# EAGLE board usbtinyisp_single (EAGLE 6.5.0)
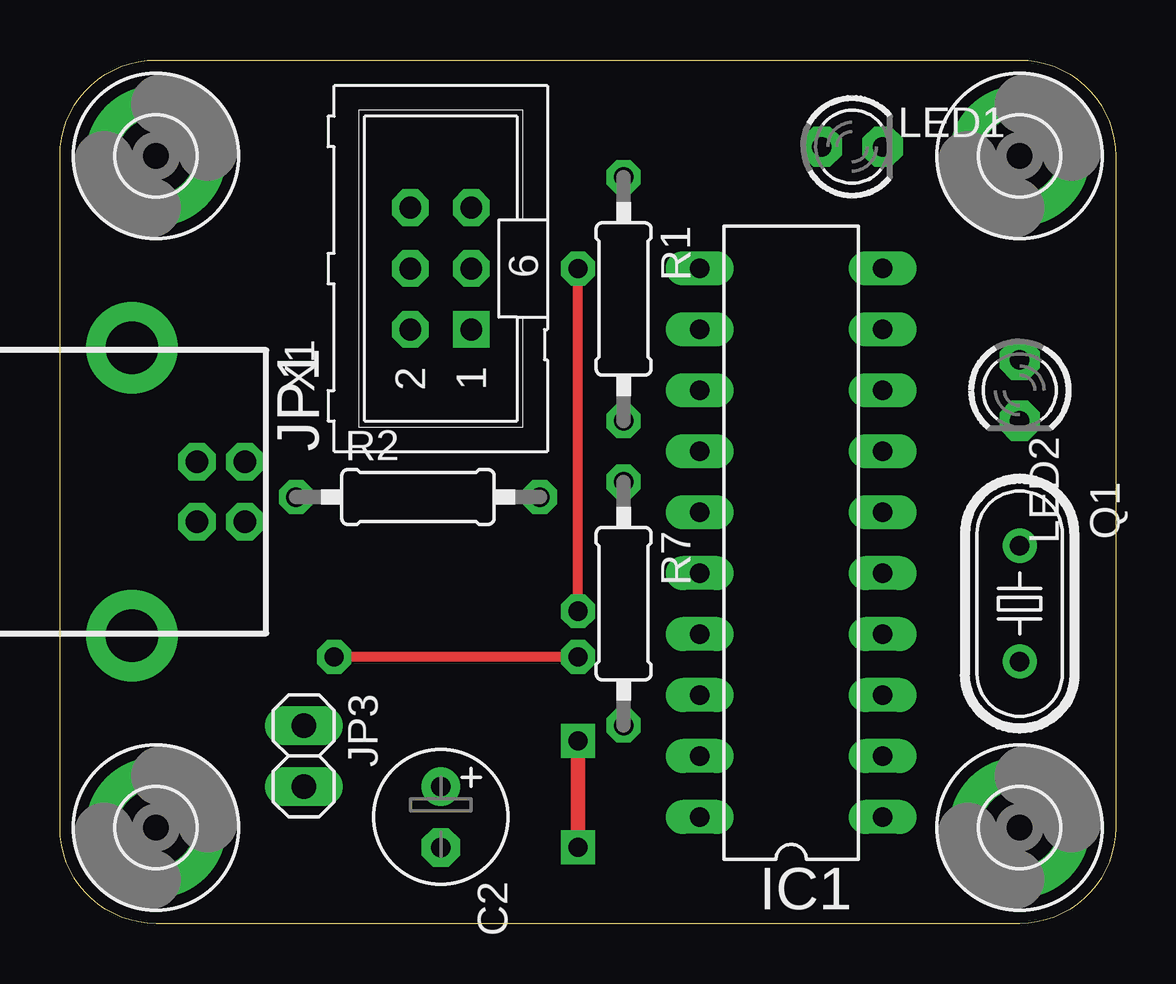
[diagram p0: board, top side]
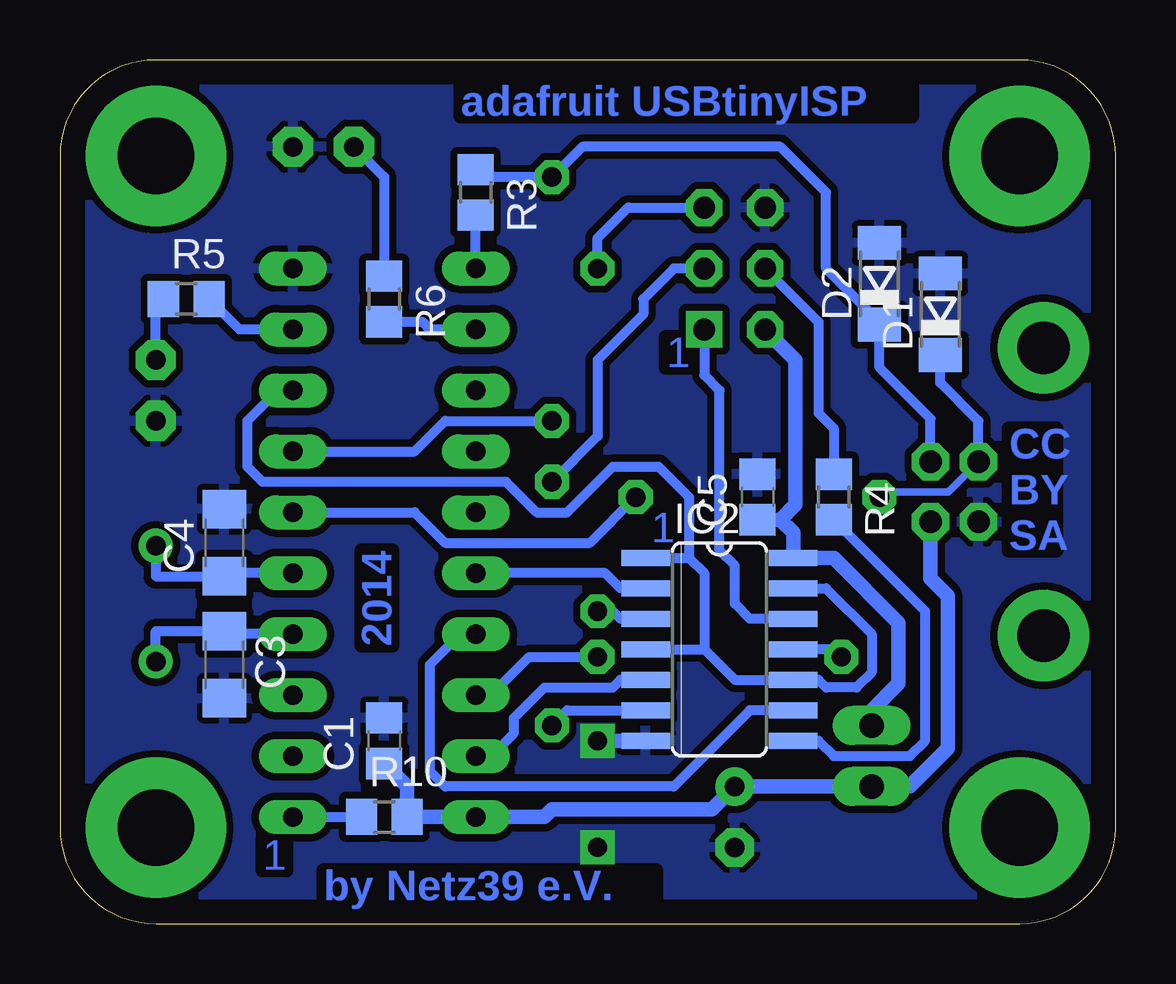
[diagram p1: board, bottom side, seen from below]

Size 44 x 36 mm. Coordinates in mm from the lower left corner, seen from the top.
Outline: 4,36 40,36 arc-90 44,32 44,4 arc-90 40,0 4,0 arc-90 0,4 0,32 arc-90 4,36
Copper layers (1*16): Top 0.035mm / dielectric 1.5mm / Bottom 0.035mm
Design rules "default *": minimum track width 12mil, minimum drill 0.8mm, track to track 12mil, track to pad 12mil, pad to pad 12mil, via to via 12mil, smd to smd 0mil, copper to edge 40mil, drill to drill 8mil, minimum pad ring 12mil, minimum via ring 12mil, stop-mask expansion 4mil, vias tented up to drill 0mil, thermal gap 10mil
Net classes: 0 default: width 0.305 mm; 1 supply: width 0.406 mm

## Footprints (pad centres in the part's own frame; a part is rotated, then mirrored left to right if it is on the bottom)
C0805 = smd 1.3 x 1.5: 1 -0.95,0; 2 0.95,0
E2,5-6 = drill 0.813 pad 1.6: + -1.27,0 | drill 0.813 pad 1.6 octagon: - 1.27,0
C1206 = smd 1.6 x 1.8: 1 -1.4,0; 2 1.4,0
SOD80C = smd 1.4 x 1.8: A 1.7,0; C -1.7,0
DIL20 = drill 0.813 long: 1 -11.43,-3.81; 2 -8.89,-3.81; 3 -6.35,-3.81; 4 -3.81,-3.81; 5 -1.27,-3.81; 6 1.27,-3.81; 7 3.81,-3.81; 8 6.35,-3.81; 9 8.89,-3.81; 10 11.43,-3.81; 11 11.43,3.81; 12 8.89,3.81; 13 6.35,3.81; 14 3.81,3.81; 15 1.27,3.81; 16 -1.27,3.81; 17 -3.81,3.81; 18 -6.35,3.81; 19 -8.89,3.81; 20 -11.43,3.81
SO14 = smd 0.66 x 2.032: 1 -3.81,-3.073; 2 -2.54,-3.073; 3 -1.27,-3.073; 4 0,-3.073; 5 1.27,-3.073; 6 2.54,-3.073; 7 3.81,-3.073; 8 3.81,3.073; 9 2.54,3.073; 10 1.27,3.073; 11 0,3.073; 12 -1.27,3.073; 13 -2.54,3.073; 14 -3.81,3.073
ML6 = drill 0.914 square: 1 -2.54,-1.27 | drill 0.914 octagon: 2 -2.54,1.27; 3 0,-1.27; 4 0,1.27; 5 2.54,-1.27; 6 2.54,1.27
1X02 = drill 1.016 long: 1 -1.27,0; 2 1.27,0
LED3MM = drill 0.813 pad 1.676 octagon: A -1.27,0; K 1.27,0
HC49U-V = drill 0.813: 1 -2.413,0; 2 2.413,0
0207/10 = drill 0.813 octagon: 1 -5.08,0; 2 5.08,0
R0805 = smd 1.3 x 1.5: 1 -0.95,0; 2 0.95,0
3,2-PAD = drill 3.2 pad 5.842: B3,2 0,0
PN61729 = drill 0.95 pad 1.575 octagon: 1 1.25,4.71; 2 -1.25,4.71; 3 -1.25,2.71; 4 1.25,2.71 | drill 2.2 pad 3.81: P$1 -6,0; P$2 6,0

## Placement (x,y rotation side)
C1  100n  [C0805]  30.48,7.62 90 bottom
C2  100u  [E2,5-6]  15.88,4.45 270 top
C3  22p  [C1206]  37.15,10.79 270 bottom
C4  22p  [C1206]  37.15,15.88 90 bottom
C5  100n  [C0805]  14.92,17.78 90 bottom
D1  3V6  [SOD80C]  7.3,25.4 90 bottom
D2  3V6  [SOD80C]  9.84,26.67 90 bottom
IC1  ATTINY2313-20P  [DIL20]  30.48,15.88 90 top
IC2  74LVX125D  [SO14]  16.51,11.43 270 bottom
JP1  [ML6]  15.88,27.3 90 top
JP3  PWR  [1X02]  10.16,6.99 270 top
LED1  [LED3MM]  33.02,32.38 0 top
LED2  [LED3MM]  40.01,22.23 270 top
Q1  12000  [HC49U-V]  40.01,13.34 270 top
R1  68  [0207/10]  23.5,26.04 270 top
R2  68  [0207/10]  14.92,17.78 0 top
R3  1k5  [R0805]  26.67,30.48 270 bottom
R4  1k5  [R0805]  11.75,17.78 270 bottom
R5  1k5  [R0805]  38.73,26.04 0 bottom
R6  1k5  [R0805]  30.48,26.04 270 bottom
R7  1k5  [0207/10]  23.5,13.34 270 top
R10  10k  [R0805]  30.48,4.45 0 bottom
U$1  [3,2-PAD]  4,4 0 top
U$2  [3,2-PAD]  40,4 0 top
U$3  [3,2-PAD]  40,32 0 top
U$4  [3,2-PAD]  4,32 0 top
X1  [PN61729]  3,18 270 top

## Library data of the parts
C1-C5 R1-R7 R10 = rcl
D1 D2 = diode
IC1 = avr
IC2 = 74xx-eu
JP1 = con-ml; OC_FARNELL: unknown; OC_NEWARK: unknown
JP3 = pinhead
LED1 LED2 = minimidi
Q1 = crystal; OC_FARNELL: 1666969; OC_NEWARK: unknown
U$1-U$4 = holes
X1 = con-berg-ez

## Nets
GND [supply]: C1.2 C2.- C3.2 C4.2 C5.2 D1.A D2.A IC1.10 IC2.7 JP1.6 LED1.K LED2.K X1.4
MISO: IC2.12 JP1.1
MISO': IC1.18 IC2.11
MOSI: JP1.4 R4.1
MOSI': IC1.17 IC2.9
N$1: D2.C R1.1 R3.1 X1.2
N$2: D1.C R2.1 X1.3
N$3: IC1.7 R1.2
N$5: LED1.A R6.1
N$6: IC1.6 R2.2
N$7: IC1.12 R6.2
N$9: IC1.1 R10.1
N$10: IC1.9 R5.2
N$11: LED2.A R5.1
N$12: IC2.6 R7.2
N$13: IC2.8 R4.2
N$15: IC1.8 IC2.1 IC2.4 IC2.10 IC2.13
N$16: IC1.11 R3.2
RST: IC2.3 JP1.5
RST': IC1.16 IC2.2
SCK: JP1.3 R7.1
SCK': IC1.19 IC2.5
VCC [supply]: C1.1 C2.+ IC1.20 JP3.2 R10.2 X1.1
VTARGET [supply]: C5.1 IC2.14 JP1.2 JP3.1
XTAL1: C4.1 IC1.5 Q1.1
XTAL2: C3.1 IC1.4 Q1.2

## Tracks (layer width: path | path; a pad name or v marks a point on that pad's centre or on a via)
GND  (via drill 0.8)
  Top 0.61: v21.59,7.62 v21.59,3.17
  Bottom 0.61: IC2.7 v21.59,7.62
  pour Bottom: 0,4 arc90 4,0 40,0 arc90 44,4 44,32 arc90 40,36 4,36 arc90 0,32
MISO
  Bottom 0.406: JP1.1 17.14,22.86 16.51,22.23 16.51,15.56 15.88,14.92 15.88,13.34 15.24,12.7 IC2.12
MISO'  (via drill 0.8)
  Top 0.406: v21.59,11.11 v11.43,11.11
  Bottom 0.406: IC1.18 26.04,9.53 24.45,11.11 v21.59,11.11 | v11.43,11.11 11.75,11.43 IC2.11
MOSI
  Bottom 0.406: JP1.4 12.38,25.08 12.38,21.27 11.75,20.64 R4.1
MOSI'
  Bottom 0.406: IC2.9 15.24,8.89 18.41,5.71 27.94,5.71 28.57,6.35 28.57,10.79 27.3,12.06 IC1.17
N$1
  Bottom 0.406: R3.1 26.36,31.11 R1.1 22.23,32.38 13.97,32.38 12.06,30.48 12.06,27.3 9.73,24.97 D2.C 9.84,23.18 7.71,21.05 X1.2
N$2
  Bottom 0.305: X1.3 6.96,18 9.62,18 R2.1
  Bottom 0.406: X1.3 5.71,20.95 7.3,22.54 D1.C
N$3
  Bottom 0.406: IC1.7 29.21,19.68 27.94,20.95 R1.2
N$5
  Bottom 0.406: LED1.A 30.48,31.11 R6.1
N$6
  Bottom 0.406: IC1.6 29.21,17.14 27.94,15.88 21.91,15.88 R2.2
N$7
  Bottom 0.406: IC1.12 28.57,24.77 28.89,25.09 R6.2
N$9
  Bottom 0.406: IC1.1 R10.1
N$10
  Bottom 0.406: IC1.9 36.52,24.77 R5.2
N$11
  Bottom 0.406: LED2.A 40.01,25.71 R5.1
N$12
  Bottom 0.406: R7.2 22.86,8.89 IC2.6
N$13
  Bottom 0.406: IC2.8 12.38,7.62 11.75,6.99 8.57,6.99 7.94,7.62 7.94,13.02 10.16,15.24 R4.2
N$15
  Bottom 0.406: IC1.8 34.92,22.23 36.2,20.95 36.2,19.05 35.56,18.41 25.4,18.41 24.13,17.14 22.86,17.14 20.95,19.05 19.05,19.05 17.78,17.78 17.78,15.24 | IC2.4 17.14,11.43 | 17.14,11.43 15.88,10.16 IC2.10 12.38,10.16 12.06,9.84 10.79,9.84 10.16,10.48 10.16,12.06 12.06,13.97 IC2.13 | IC2.1 17.78,15.24 | 17.78,15.24 17.14,14.61 17.14,11.43
N$16
  Bottom 0.406: IC1.11 R3.2
RST  (via drill 0.8)
  Top 0.406: v21.59,13.02 v21.59,27.3
  Bottom 0.406: IC2.3 20.64,12.7 20.95,13.02 v21.59,13.02 | v21.59,27.3 21.59,28.57 20.32,29.84 JP1.5
RST'
  Bottom 0.406: IC2.2 20.64,13.97 21.27,14.61 IC1.16
SCK
  Bottom 0.406: JP1.3 18.41,27.3 19.68,26.04 19.68,25.4 21.59,23.5 21.59,20.32 R7.1
SCK'
  Bottom 0.406: IC1.19 26.04,6.99 25.08,7.94 25.08,8.57 23.81,9.84 20.95,9.84 20.64,10.16 IC2.5
VCC
  Bottom 0.61: C1.1 29.53,5.72 R10.2 IC1.20 23.81,4.45 23.5,4.76 16.83,4.76 C2.+ JP3.2 8.57,5.71 6.99,7.3 6.99,13.65 7.71,14.38 X1.1
VTARGET
  Bottom 0.61: JP3.1 10.16,8.89 9.05,10 9.05,12.54 11.75,15.24 IC2.14 13.44,16.29 13.97,16.83 | JP1.2 13.34,23.5 13.34,17.46 13.97,16.83 | 13.97,16.83 C5.1
XTAL1
  Bottom 0.406: IC1.5 37.02,14.61 C4.1 40.01,14.47 Q1.1
XTAL2
  Bottom 0.406: IC1.4 37.02,12.06 C3.1 40.01,12.2 Q1.2

## Text on the board
Bottom: adafruit USBtinyISP | 1 | CC / BY / SA | 1 | 2014 | 1 | by Netz39 e.V.